# Altium PCB ESC.PcbDoc (part 2 of 2)
Units mm, origin at the board's own origin, x right, y up, seen from the top; angles counter-clockwise.
Board outline 45.01 x 30 mm, 4 copper layers (L1-SIGNAL/PWR, L2-GND, L3-PWR, L4-SIGNAL/PWR), stack 1.723 mm thick; 140 components, 74 nets, 427 pads, 338 vias.
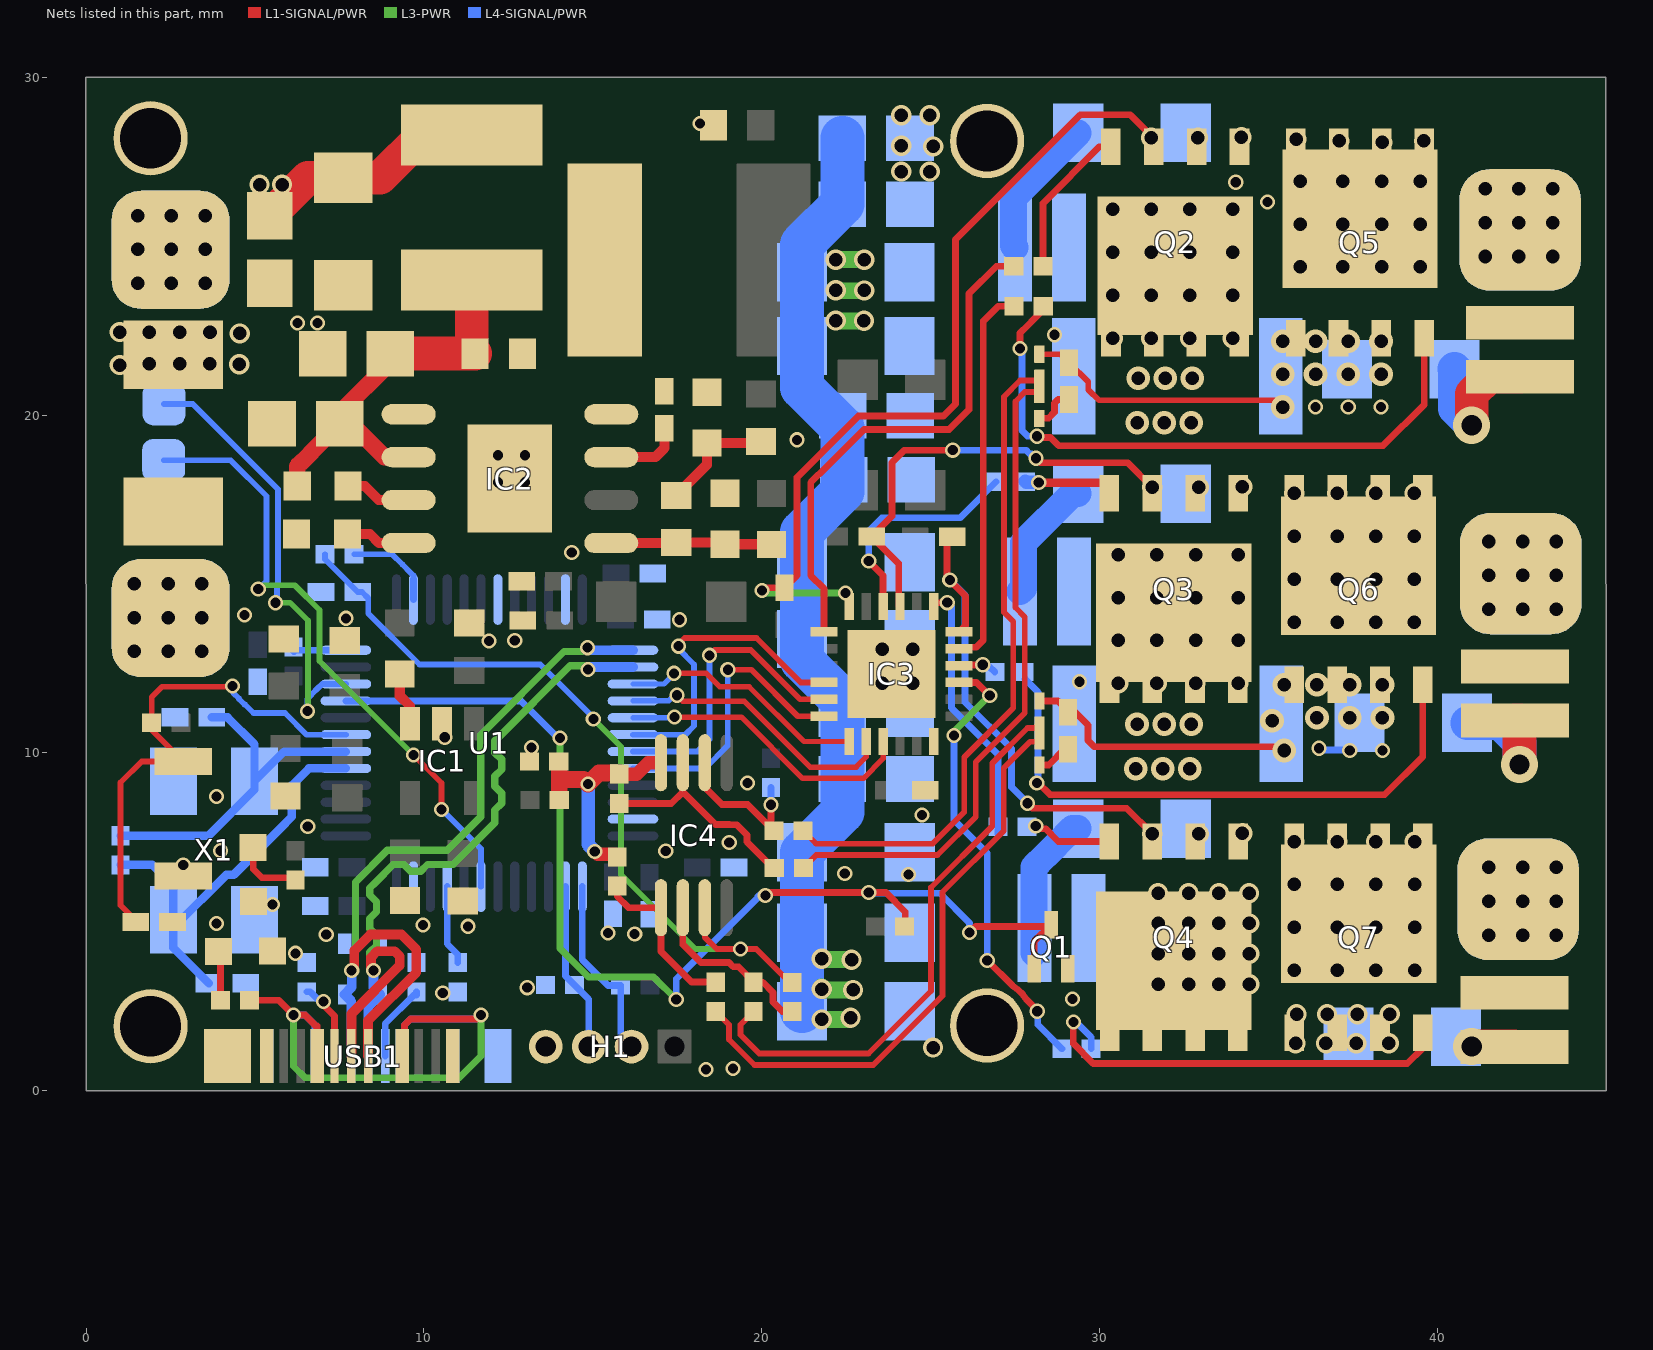
[diagram p4: the nets of this part, all layers, seen from the top]

## Via types
v1: diameter 0.6, hole 0.4, L1-SIGNAL/PWR to L4-SIGNAL/PWR, 160 vias
v2: diameter 0.45, hole 0.3, L1-SIGNAL/PWR to L4-SIGNAL/PWR, tented both sides, 105 vias
v3: diameter 0.6, hole 0.4, L1-SIGNAL/PWR to L4-SIGNAL/PWR, tented both sides, 35 vias
v4: diameter 0.7, hole 0.4, L1-SIGNAL/PWR to L4-SIGNAL/PWR, tented both sides, 24 vias
v5: diameter 0.7, hole 0.4, L1-SIGNAL/PWR to L4-SIGNAL/PWR, 6 vias
v6: diameter 0.45, hole 0.3, L1-SIGNAL/PWR to L4-SIGNAL/PWR, 5 vias
v7: diameter 1.1, hole 0.6, L1-SIGNAL/PWR to L4-SIGNAL/PWR, tented both sides, 2 vias
v8: diameter 1.1, hole 0.6, L1-SIGNAL/PWR to L4-SIGNAL/PWR, 1 vias

## Nets (pads, with @x,y where several pads share a name; then routed paths per layer and width w, separated by ;. In a path a pad name is that pad's centre, name@x,y a point inside that pad or via, vN(x,y) a via of type N, cw(c..) or ccw(c..) an arc to the next point about the centre after c; other vN are vias at no path point) (continued)
CSB: C43.2 IC4.7 R9.1 R23.1 | length 23.7
  L1-SIGNAL/PWR w0.17: IC4.7@18.315,5.414 18.315,4.541 18.666,4.19 19.838,4.19 20.827,3.201 R9.1@20.904,3.201
  L3-PWR w0.17: v2(15.014,10.996) 15.834,10.177 15.834,6.398 18.042,4.19 v2(19.369,4.19)
  L4-SIGNAL/PWR w0.17: R23.1@7.066,15.875 7.066,15.733 C43.2@8.042,14.758 8.167,14.758 8.352,14.573 8.352,14.128 9.866,12.614 13.441,12.614 15.014,11.041 v2(15.014,10.996)
GHA: IC3.19 R27.1 | length 15.3
  L1-SIGNAL/PWR w0.2: IC3.19@21.845,13.583 21.845,14.858 21.45,15.253 21.45,17.998 21.948,18.496 23.027,19.575 25.552,19.575 26.136,20.16 26.136,23.596 26.944,24.404 R27.1@27.462,24.404
GHB: IC3.16 R28.1 | length 6.8
  L1-SIGNAL/PWR w0.2: v2(23.168,15.675) 23.595,15.248 IC3.16@23.595,14.333
  L4-SIGNAL/PWR w0.2: v2(23.168,15.675) 23.168,16.56 23.564,16.956 25.872,16.956 R28.1@26.944,18.027
GHC: IC3.13 R29.1 | length 7.9
  L1-SIGNAL/PWR w0.2: IC3.13@25.095,14.333 25.095,14.405 25.135,14.445 v2(25.493,14.445)
  L4-SIGNAL/PWR w0.2: v2(25.493,14.445) 25.618,14.32 25.618,13.152 25.618,11.332 26.995,9.955 R29.1@26.995,7.606
GLA: IC3.11 R33.1 | length 11.4
  L1-SIGNAL/PWR w0.2: IC3.11@25.845,13.083 25.885,13.123 26.349,13.123 26.563,13.337 26.563,22.781 27.006,23.225 R33.1@27.47,23.225
GLB: IC3.10 R34.1 | length 1.2
  L1-SIGNAL/PWR w0.2: IC3.10@25.845,12.583 25.857,12.596 26.53,12.596 v2(26.543,12.608)
  L4-SIGNAL/PWR w0.2: v2(26.543,12.608) 26.574,12.608 26.622,12.56 26.733,12.56 R34.1@26.903,12.39
GLC: IC3.9 R35.1 | length 13.4
  L1-SIGNAL/PWR w0.2: IC3.9@25.845,12.083 26.363,12.083 v2(26.751,11.695) ; v2(26.679,3.853) 27.428,3.103 cw(c26.673,1.924) 27.852,2.679 28.073,2.458 28.073,2.431 v2(28.157,2.347)
  L3-PWR w0.2: v2(25.692,10.515) 25.663,10.515 25.617,10.561 v2(26.751,11.695)
  L4-SIGNAL/PWR w0.2: v2(25.692,10.515) 25.692,8.005 26.681,7.016 26.679,7.014 v2(26.679,3.853) ; v2@28.177,2.344 28.177,1.947 R35.1@28.89,1.234
GND: -.1 C1.1 C2.1 C4.1 C5.1 C6.1 C7.1 C8.1 C9.1 C10.1 C11.1 C12.1 C13.1 C14.1 C15.1 C16.1 C17.1 C18.1 C19.1 C20.1 C21.1 C22.1 C23.1 C24.1 C25.1 C26.1 C27.1 C28.1 C29.1 C30.1 C31.1 C32.1 C33.1 C34.1 C35.2 C36.1 C37.1 C40.1 C41.2 C42.1 C43.1 C52.1 C53.1 C54.1 D1.1 D2.1 D4.1 H1.4 IC1.2 IC2.1 IC2.9 IC3.6 IC3.25 J3.2 J4.2 LED1.1 LED2.1 pad.11 Q1.2 Q7.1 Q7.2 Q7.3 R4.1 R5.2 R13.1 R18.1 R19.2 R20.2 R38.1 R39.1 R45.1 SW1.2 TP5.1 U1.19 U1.23 U1.35 U1.47 USB1.0 USB1.A1 USB1.A12 USB1.B1 USB1.B12 X1.2 X1.4 | length 2.3
  L1-SIGNAL/PWR w0.2: J3.2@28.22,19.9 28.225,19.905 28.493,19.905 28.673,20.085 28.673,20.353 28.778,20.458 C53.1@29.101,20.458 ; C54.1@29.068,10.108 28.967,10.108 28.499,9.639 J4.2@28.232,9.639 ; J4.2@28.232,9.639 J4.2@28.227,9.635 J4.2@28.232,9.639
  other v1: 35.806,1.4 36.706,1.4 35.838,2.262 36.738,2.262 24.472,12.055 1.426,13 2.426,13 3.426,13 24.472,13.066 1.426,14 2.426,14 3.426,14 1.426,15 2.426,15 3.426,15 25.078,27.952 24.13,27.975
  other v2: 18.352,0.624 19.154,0.651 29.198,2.707 10.557,2.891 13.057,3.045 6.198,4.062 7.107,4.617 16.239,4.636 15.451,4.661 11.306,4.861 9.975,4.901 3.858,4.943 5.516,5.508 24.344,6.394 22.46,6.429 2.871,6.679 3.976,7.099 17.159,7.088 19.039,7.345 6.557,7.82 24.744,8.162 3.858,8.702 19.579,9.101 13.183,10.156 10.616,10.461 29.412,12.104 11.921,13.314 12.686,13.321 17.562,13.94 7.688,13.981 4.689,14.082 14.376,15.93 21.042,19.266 28.666,22.377 6.257,22.725 6.85,22.725 34.979,26.311 34.037,26.893 18.17,28.63
  other v3: 25.072,1.273 37.606,1.4 38.567,1.403 37.638,2.262 38.599,2.265 23.572,12.055 23.572,13.066 24.13,27.21 24.973,27.21 24.13,28.875 24.973,28.875
  other v4: 31.077,9.525 31.877,9.525 32.677,9.525 31.114,10.842 31.914,10.842 32.714,10.842 31.118,19.774 31.916,19.769 32.716,19.769 31.153,21.085 31.953,21.085 32.753,21.085
  other v6: 12.195,18.012 12.995,18.012 12.195,18.812 12.995,18.812
INHA: IC3.22 U1.30 | length 9.5
  L1-SIGNAL/PWR w0.17: v2(17.534,13.157) 17.563,13.157 17.563,13.241 17.717,13.395 19.843,13.395 21.156,12.083 IC3.22@21.845,12.083
  L4-SIGNAL/PWR w0.17: U1.30@16.188,10.537 17.044,10.537 17.737,10.537 17.998,10.797 17.998,12.617 17.534,13.081 v2(17.534,13.157)
INHB: IC3.23 U1.31 | length 9
  L1-SIGNAL/PWR w0.17: v2(18.451,12.885) 18.608,13.043 19.675,13.043 21.134,11.583 IC3.23@21.845,11.583
  L4-SIGNAL/PWR w0.17: U1.31@16.188,10.037 18.089,10.037 18.451,10.399 v2(18.451,12.885)
INHC: IC3.24 U1.32 | length 8.8
  L1-SIGNAL/PWR w0.17: v2(18.997,12.459) 19,12.457 19.694,12.457 21.068,11.083 IC3.24@21.845,11.083
  L4-SIGNAL/PWR w0.17: U1.32@16.188,9.537 18.322,9.537 18.997,10.213 v2(18.997,12.459)
INLA: IC3.1 U1.27 | length 7.4
  L1-SIGNAL/PWR w0.16: v2(17.4,12.352) 18.361,12.352 18.759,11.954 19.631,11.954 21.252,10.333 IC3.1@22.595,10.333
  L4-SIGNAL/PWR w0.16: U1.27@16.188,12.037 17.108,12.037 17.4,12.33 v2(17.4,12.352)
INLB: IC3.2 U1.28 | length 8.4
  L1-SIGNAL/PWR w0.16: v2(17.488,11.703) 17.663,11.528 18.611,11.528 19.48,11.528 21.435,9.573 22.794,9.573 23.095,9.874 IC3.2@23.095,10.333
  L4-SIGNAL/PWR w0.16: U1.28@16.188,11.537 17.243,11.537 17.409,11.703 v2(17.488,11.703)
INLC: IC3.3 U1.29 | length 8.9
  L1-SIGNAL/PWR w0.16: v2(17.415,11.057) 17.417,11.055 17.64,11.055 19.402,11.055 21.214,9.243 23.007,9.243 23.595,9.831 IC3.3@23.595,10.333
  L4-SIGNAL/PWR w0.16: U1.29@16.188,11.037 17.395,11.037 v2(17.415,11.057)
JTCK/SWCLK: H1.3 R45.2 U1.38 | length 5
  L4-SIGNAL/PWR w0.2: U1.38@14.188,6.037 14.188,3.393 R45.2@14.46,3.121 14.876,2.704 H1.3@14.876,1.301
JTMS/SWDIO: H1.2 R44.1 U1.37 | length 5.6
  L4-SIGNAL/PWR w0.2: U1.37@14.688,6.037 14.688,3.87 15.043,3.515 15.447,3.111 R44.1@15.823,3.111 15.823,1.624 H1.2@16.146,1.301
NetC3_1: C3.1 IC2.8 L1.1 RA.2
NetC3_2: C3.2 IC2.7 | length 2.3
  L1-SIGNAL/PWR w0.3: IC2.7@15.546,18.753 16.848,18.753 17.117,19.022 C3.2@17.117,19.611
NetC47_2: C47.2 R24.1 | length 4.2
  L4-SIGNAL/PWR w0.8: R24.1@27.501,24.966 27.451,25.016 27.451,26.434 C47.2@29.372,28.355
NetC48_2: C48.2 R25.1 | length 3.7
  L4-SIGNAL/PWR w0.8: R25.1@27.645,14.771 27.745,14.871 27.745,16.219 29.199,17.673 C48.2@29.372,17.673
NetC49_2: C49.2 R26.1 | length 4.2
  L4-SIGNAL/PWR w0.8: R26.1@28.069,4.066 28.069,6.624 28.387,6.942 ; 28.459,7.01 28.743,7.294 28.743,7.298 29.198,7.753 C49.2@29.372,7.753
NetC50_1: C50.1 C53.2 J1.2 Q5.1 Q5.2 Q5.3 R38.2 | length 8
  L1-SIGNAL/PWR w0.17: J1.2@28.221,21.802 28.226,21.797 28.853,21.797 C53.2@29.101,21.548 29.666,20.984 ; 29.666,20.983 29.671,20.977 29.671,20.748 29.984,20.435 30.884,20.435 32.969,20.435 35.23,20.435 v4(35.427,20.238)
  other v2: 36.397,20.238 37.367,20.238 38.337,20.238
  other v4: 35.427,21.208 36.397,21.208 37.367,21.208 38.337,21.208 36.397,22.182
  other v5: 35.427,22.182 37.367,22.182 38.337,22.182
NetC50_2: C50.2 R30.1 | length 4.4
  L1-SIGNAL/PWR w1: v7(41.021,19.699) 41.021,20.623 41.529,21.131 R30.1@42.447,21.131
  L4-SIGNAL/PWR w1: C50.2@40.513,21.36 40.524,21.35 40.524,20.196 v7(41.021,19.699)
NetC51_1: C51.1 C54.2 J2.2 Q6.1 Q6.2 Q6.3 R39.2 | length 9.1
  L1-SIGNAL/PWR w0.2: J2.2@28.227,11.533 28.768,11.533 29.068,11.232 29.248,11.232 29.664,10.817 29.664,10.364 29.853,10.175 35.364,10.175 v5(35.471,10.068)
  L4-SIGNAL/PWR w0.2: v2(36.499,10.134) 36.547,10.086 C51.1@37.403,10.086 ; C51.1@37.37,10.053 C51.1@37.395,10.029
  other v2: 37.411,10.068 38.381,10.068
  other v4: 36.441,11.038 37.411,11.038 38.381,11.038 36.441,12.012 37.411,12.012 38.381,12.012
  other v5: 35.11,10.947 35.471,12.012
NetC51_2: C51.2 R31.1 | length 3.9
  L1-SIGNAL/PWR w1: R31.1@42.298,10.954 42.441,10.954 v7(42.441,9.652)
  L4-SIGNAL/PWR w1: C51.2@40.888,10.885 41.859,10.885 42.441,10.303 v7(42.441,9.652)
NetC52_2: C52.2 R32.1 | length 1.3
  L1-SIGNAL/PWR w1: v8(41.021,1.301) R32.1@42.281,1.301
NetCA_1: CA.1 CB.2 RA.1 | length 3.5
  L1-SIGNAL/PWR w0.3: CB.2@17.473,17.625 18.376,18.528 RA.1@18.376,19.17 19.931,19.17 CA.1@19.98,19.22
NetCB_1: CB.1 IC2.5 R1.1 R5.1 | length 4.8
  L1-SIGNAL/PWR w0.3: IC2.5@15.546,16.213 17.461,16.213 CB.1@17.473,16.225 18.864,16.225 R5.1@18.914,16.175 20.279,16.175 R1.1@20.286,16.169
NetIC1_3: IC1.3 R2.2 | length 1.6
  L1-SIGNAL/PWR w0.3: R2.2@9.284,12.334 9.284,11.684 9.584,11.384 IC1.3@9.584,10.862
NetIC2_3: IC2.3 R3.2 | length 2
  L1-SIGNAL/PWR w0.3: R3.2@7.754,17.9 8.245,17.9 8.662,17.483 IC2.3@9.546,17.483
NetIC2_4: IC2.4 R4.2 | length 1.9
  L1-SIGNAL/PWR w0.3: R4.2@7.733,16.478 8.4,16.478 8.665,16.213 IC2.4@9.546,16.213
NetIC4_2: IC4.2 R8.1 R10.2 | length 4.7
  L1-SIGNAL/PWR w0.2: IC4.2@18.315,9.706 18.315,8.971 18.819,8.467 19.584,8.467 R10.2@20.276,7.776 ; v2(20.276,8.461) R10.2@20.276,7.776 ; R10.2@20.483,7.568 R10.2@20.359,7.692 R10.2@20.276,7.776
  L4-SIGNAL/PWR w0.2: v2(20.276,8.461) R8.1@20.276,8.972
NetIC4_3: IC4.3 R14.1 R16.2 | length 6.6
  L1-SIGNAL/PWR w0.2: R14.1@15.784,8.501 17.322,8.501 17.665,8.845 ; IC4.3@17.665,9.706 17.665,8.845 ; R16.2@20.37,6.589 20.339,6.589 19.564,7.364 19.564,7.563 19.257,7.87 19.058,7.87 19.05,7.878 18.632,7.878 17.665,8.845
NetIC4_5: IC4.5 R15.2 R17.1 | length 5
  L1-SIGNAL/PWR w0.2: R15.2@15.724,6.05 15.724,5.749 16.058,5.414 IC4.5@17.015,5.414 17.015,4.118 17.918,3.215 18.626,3.215 R17.1@18.637,3.205
NetIC4_6: IC4.6 R9.2 R11.1 | length 5.3
  L1-SIGNAL/PWR w0.2: IC4.6@17.665,5.414 17.665,4.327 18.204,3.788 19.031,3.788 19.154,3.665 19.313,3.665 19.76,3.218 R11.1@19.76,3.205 20.034,3.205 20.334,2.906 20.334,2.618 20.617,2.336 R9.2@20.904,2.336
NetLED1_2: LED1.2 R42.2 | length 2
  L1-SIGNAL/PWR w0.2: LED1.2@4.944,7.202 4.944,6.554 5.195,6.303 6.129,6.303 R42.2@6.198,6.234
NetLED2_2: LED2.2 R43.2 | length 1.5
  L1-SIGNAL/PWR w0.2: LED2.2@3.917,4.118 3.973,4.062 R43.2@3.973,2.674
NetQ2_4: Q2.4 R27.2 | length 4.6
  L1-SIGNAL/PWR w0.2: R27.2@28.327,24.404 28.327,26.27 30.004,27.947 Q2.4@30.338,27.947
NetQ3_4: Q3.4 R28.2 | length 2.7
  L1-SIGNAL/PWR w0.25: v2(28.204,18.001) 28.486,18.001 30.129,18.001 30.294,17.836 Q3.4@30.294,17.682
  L4-SIGNAL/PWR w0.4: R28.2@27.807,18.033 27.829,18.011 28.195,18.011 v2(28.204,18.001)
NetQ4_4: Q4.4 R29.2 | length 2.4
  L1-SIGNAL/PWR w0.2: v2(28.113,7.83) 28.127,7.83 28.204,7.753 28.401,7.753 28.781,7.373 Q4.4@30.296,7.373
NetQ5_4: Q5.4 R33.2 | length 18.6
  L1-SIGNAL/PWR w0.2: v6(27.65,21.971) 27.65,22.428 27.877,22.655 28.053,22.83 28.336,23.113 R33.2@28.336,23.225 ; v2(28.153,19.374) 28.191,19.335 28.552,19.335 28.793,19.094 30.932,19.094 38.398,19.094 39.62,20.316 Q5.4@39.62,22.277
  L4-SIGNAL/PWR w0.2: v6(27.65,21.971) 27.66,21.961 27.705,21.961 27.705,19.541 27.872,19.374 v2(28.153,19.374)
NetQ6_4: Q6.4 R34.2 | length 17.4
  L1-SIGNAL/PWR w0.2: v2(28.146,9.108) 28.165,9.127 28.532,8.76 38.447,8.76 39.576,9.888 Q6.4@39.576,12.012
  L4-SIGNAL/PWR w0.2: R34.2@27.797,12.181 28.184,11.794 28.184,9.147 v2(28.146,9.108)
NetQ7_4: Q7.4 R35.2 | length 12.9
  L1-SIGNAL/PWR w0.2: v2(29.228,2.025) 29.228,1.386 29.814,0.8 39.113,0.8 39.578,1.265 Q7.4@39.578,1.704
  L4-SIGNAL/PWR w0.2: v2@29.272,2.064 29.755,1.58 R35.2@29.755,1.234
NetR18_2: R18.2 USB1.A5 | length 2.4
  L1-SIGNAL/PWR w0.2: v2(7.022,2.638) 7.023,2.535 7.029,2.529 7.35,2.208 USB1.A5@7.35,1.016
  L4-SIGNAL/PWR w0.2: R18.2@6.53,2.922 6.636,2.922 6.971,2.587 v2(7.022,2.638)
NetR19_1: R19.1 U1.45 | length 2.4
  L4-SIGNAL/PWR w0.2: U1.45@10.688,6.037 10.688,4.344 10.998,4.034 R19.1@10.998,3.788
NetR20_1: R20.1 USB1.B5 | length 2.3
  L4-SIGNAL/PWR w0.2: USB1.B5@8.85,1.016 8.85,1.978 9.702,2.83 9.778,2.83 R20.1@9.778,2.922
NetR22_2: R22.2 U1.12 | length 1.6
  L4-SIGNAL/PWR w0.2: R22.2@6.14,13.135 6.237,13.037 U1.12@7.688,13.037 ; R22.2@6.149,12.994 R22.2@6.192,13.037
NetR23_2: R23.2 U1.14 | length 3.3
  L4-SIGNAL/PWR w0.17: R23.2@7.932,15.875 9.059,15.875 9.362,15.572 9.608,15.326 9.688,15.246 U1.14@9.688,14.537
  L4-SIGNAL/PWR w0.2: U1.14@9.688,14.537 U1.14@9.688,15.146
OSC_IN: C40.2 R12.2 U1.5 X1.3 | length 12.6
  L4-SIGNAL/PWR w0.25: R12.2@1.016,6.679 1.957,6.679 2.583,6.053 2.583,5.339 X1.3@2.583,5.062 ; C40.2@3.635,3.173 2.583,4.225 X1.3@2.583,5.062 ; U1.5@7.688,9.537 6.591,9.537 6.088,9.034 6.088,8.108 6.008,8.027 5.817,7.837 4.367,6.387 4.148,6.387 3.958,6.197 2.823,5.062 X1.3@2.583,5.062
OSC_OUT: C41.1 R12.1 U1.6 X1.1 | length 10.5
  L4-SIGNAL/PWR w0.25: R12.1@1.016,7.545 3.62,7.545 4.983,8.907 X1.1@4.983,9.162 ; C41.1@3.72,11.049 4.187,11.049 4.983,10.253 X1.1@4.983,9.162 ; U1.6@7.688,10.037 5.858,10.037 X1.1@4.983,9.162
PWM/DSHOT: TP4.1 U1.43 | length 18.7
  L1-SIGNAL/PWR w0.17: v2(9.687,9.937) 10.52,9.104 v2(10.52,8.317)
  L3-PWR w0.17: v2(5.094,14.847) 5.209,14.962 6.173,14.962 6.908,14.227 6.908,12.715 v2(9.687,9.937)
  L4-SIGNAL/PWR w0.17: TP4.1@2.293,18.658 4.277,18.658 5.335,17.6 5.335,15.088 v2(5.094,14.847) ; v2@10.534,8.311 11.688,7.156 U1.43@11.688,6.037
RST: C35.1 R6.1 SW1.1 U1.7 | length 15.7
  L1-SIGNAL/PWR w0.17: C35.1@1.463,4.988 C35.1@1.625,4.826 ; C35.1@1.511,4.988 1.016,5.483 1.016,9.118 1.643,9.745 2.236,9.745 SW1.1@2.871,9.745 1.834,10.782 R6.1@1.938,10.886 1.938,11.652 2.241,11.954 4.314,11.954 v2(4.334,11.974)
  L4-SIGNAL/PWR w0.17: v2(4.334,11.974) 4.382,11.926 4.355,11.898 4.355,11.773 4.522,11.606 4.522,11.594 4.689,11.427 4.701,11.427 4.951,11.177 5.882,11.177 6.522,10.537 U1.7@7.688,10.537
SA_N: J1.1 R10.1 | length 19.6
  L1-SIGNAL/PWR w0.17: R10.1@21.225,7.692 21.607,7.31 25.063,7.31 25.995,8.243 25.995,9.868 27.449,11.322 27.449,13.883 27.171,14.161 27.171,20.544 27.648,21.021 28.151,21.021 J1.1@28.221,21.09
SA_P: J3.1 R16.1 | length 19.6
  L1-SIGNAL/PWR w0.17: R16.1@21.236,6.589 21.617,6.97 25.203,6.97 26.335,8.102 26.335,9.727 27.789,11.182 27.789,14.024 27.511,14.302 27.511,20.403 27.789,20.681 28.151,20.681 J3.1@28.22,20.611
SB_N: J2.1 R11.2 | length 16.9
  L1-SIGNAL/PWR w0.17: R11.2@19.76,2.34 19.369,1.948 19.369,1.651 19.925,1.095 23.161,1.095 25.013,2.946 25.013,6.015 26.824,7.826 26.824,9.687 27.869,10.732 28.087,10.732 28.176,10.821 J2.1@28.227,10.821
SB_P: J4.1 R17.2 | length 17.4
  L1-SIGNAL/PWR w0.17: R17.2@18.637,2.34 19.029,1.948 19.029,1.51 19.784,0.755 23.302,0.755 25.353,2.806 25.353,5.874 27.164,7.685 27.164,9.546 27.944,10.326 28.207,10.326 J4.1@28.227,10.346
SHA: C44.1 C47.1 IC3.18 Q2.1 Q2.2 Q2.3 Q5.5 Q5.6 Q5.7 Q5.8 Q5.9 R30.2 TP6.1 TP8.1 | length 25.5
  L1-SIGNAL/PWR w0.2: v2(20.006,14.805) 20.086,14.885 C44.1@20.674,14.885 21.042,15.253 21.042,18.155 22.861,19.975 25.386,19.975 25.736,20.325 25.736,25.197 28.073,27.534 29.429,28.889 30.915,28.889 31.538,28.266 31.538,28.017 Q2.3@31.608,27.947 ; v2(22.479,14.732) 22.595,14.616 IC3.18@22.595,14.333
  L3-PWR w0.2: v2(20.006,14.805) 20.079,14.732 v2(22.479,14.732)
  other v1: 35.941,24.384 37.211,24.384 38.354,24.384 39.497,24.384 41.421,24.695 42.421,24.695 43.421,24.695 35.941,25.654 37.211,25.654 38.354,25.654 39.497,25.654 41.421,25.695 42.421,25.695 43.421,25.695 41.421,26.695 42.421,26.695 43.421,26.695 38.375,28.072 37.103,28.116 39.608,28.116 35.83,28.164 31.538,28.208 32.918,28.208 34.205,28.227
  other v3: 35.941,26.924 37.211,26.924 38.354,26.924 39.497,26.924
SHB: C45.1 C48.1 IC3.15 Q3.1 Q3.2 Q3.3 Q6.5 Q6.6 Q6.7 Q6.8 Q6.9 R31.2 TP7.1 TP9.1 | length 13.5
  L1-SIGNAL/PWR w0.2: IC3.15@24.095,14.333 24.055,14.373 24.055,15.602 C45.1@23.254,16.403 23.857,17.005 23.857,18.591 24.226,18.96 v2(25.658,18.96) ; v2(28.12,18.722) 28.251,18.591 30.833,18.591 v1(31.564,17.861) ; Q3.3@31.564,17.682 v1(31.564,17.861) ; Q3.3@31.564,18.04 v1(31.564,17.861)
  L4-SIGNAL/PWR w0.2: v2(25.658,18.96) 27.824,18.96 27.936,18.849 27.994,18.849 v2(28.12,18.722)
  other v1: 35.771,13.871 37.041,13.871 38.184,13.871 39.327,13.871 41.53,14.256 42.53,14.256 43.53,14.256 35.771,15.141 37.041,15.141 38.184,15.141 39.327,15.141 41.53,15.256 42.53,15.256 43.53,15.256 41.53,16.256 42.53,16.256 43.53,16.256 35.771,16.411 37.041,16.411 38.184,16.411 39.327,16.411 35.771,17.681 37.041,17.681 38.184,17.681 39.327,17.681 32.944,17.861 34.232,17.879
SHC: C46.1 C49.1 IC3.12 Q4.1 Q4.2 Q4.3 Q7.5 Q7.6 Q7.7 Q7.8 Q7.9 R32.2 W.1 | length 14.8
  L1-SIGNAL/PWR w0.2: C46.1@25.64,16.4 25.485,16.244 25.485,15.18 25.694,14.97 25.71,14.97 26.018,14.662 26.018,14.646 26.035,14.629 26.035,13.773 IC3.12@25.845,13.583 ; v2(27.869,8.507) 28.021,8.355 28.33,8.355 30.809,8.355 v1(31.566,7.598)
  L4-SIGNAL/PWR w0.2: v2@25.561,15.127 26.018,14.671 26.018,11.497 27.395,10.121 27.395,8.982 v2(27.869,8.507)
  other v1: 35.773,3.563 37.043,3.563 38.186,3.563 39.329,3.563 41.529,4.604 42.529,4.604 43.529,4.604 35.773,4.833 37.043,4.833 38.186,4.833 39.329,4.833 41.529,5.604 42.529,5.604 43.529,5.604 35.773,6.103 37.043,6.103 38.186,6.103 39.329,6.103 41.529,6.604 42.529,6.604 43.529,6.604 35.773,7.373 37.043,7.373 38.186,7.373 39.329,7.373 32.946,7.598 34.234,7.617
  other v2: 25.57,15.114
TEMP: Q1.1 Q1.3 R21.1 U1.9 | length 34
  L1-SIGNAL/PWR w0.2: v2(20.107,5.777) 20.107,5.745 v2@20.194,5.745 ; v2@20.195,5.745 20.195,5.864 v2(23.17,5.864) 23.677,5.864 24.25,5.291 R21.1@24.25,4.81 ; v2@26.155,4.677 26.332,4.854 Q1.3@28.561,4.854 ; Q1.1@28.068,3.608 28.068,4.408 Q1.3@28.568,4.908
  L3-PWR w0.2: v2(14.028,10.439) 14.028,4.203 14.871,3.361 16.798,3.361 v2(17.468,2.691)
  L4-SIGNAL/PWR w0.2: U1.9@7.688,11.537 12.869,11.537 13.998,10.408 v2(14.028,10.439) ; v2(17.468,2.691) 17.468,3.302 17.857,3.691 19.885,5.718 19.885,5.745 19.916,5.777 v2(20.107,5.777) ; v2@23.241,5.842 25.273,5.842 26.154,4.961 v2(26.154,4.677)
TX: TP3.1 U1.10 | length 13.4
  L3-PWR w0.17: v2(5.603,14.442) 5.603,14.446 6.035,14.446 6.565,13.915 6.565,11.323 6.565,11.249 v2(6.548,11.232)
  L4-SIGNAL/PWR w0.17: TP3.1@2.304,20.327 3.153,20.327 5.675,17.804 5.675,14.947 5.65,14.922 5.65,14.49 v2(5.603,14.442) ; v2(6.548,11.232) 6.548,11.306 6.565,11.323 6.544,11.344 6.544,11.594 6.653,11.703 6.653,11.711 6.899,11.957 6.907,11.957 6.987,12.037 U1.10@7.688,12.037
USB_N: D2.2 U1.25 USB1.A7 USB1.B7 | length 24.7
  L1-SIGNAL/PWR w0.289: v2@7.936,3.556 v2(7.859,3.556) 7.938,3.635 7.938,4.144 8.411,4.617 9.337,4.617 9.772,4.182 9.772,3.495 8.346,2.069 8.346,1.02 USB1.A7@8.35,1.016
  L3-PWR w0.217: v2@7.972,3.556 v2(7.859,3.556) 7.974,3.671 7.974,6.169 8.917,7.112 10.688,7.112 11.678,8.102 11.678,10.527 14.148,12.997 14.725,12.997 v2(14.84,13.112)
  L4-SIGNAL/PWR w0.289: USB1.B7@7.85,1.016 7.85,2.644 D2.2@7.647,2.846 7.859,3.058 v2(7.859,3.556) ; v2(14.84,13.112) 14.859,13.112 14.938,13.033 16.184,13.033 U1.25@16.188,13.037
USB_P: D4.2 U1.26 USB1.A6 USB1.B6 | length 23.5
  L1-SIGNAL/PWR w0.289: USB1.A6@7.85,1.016 7.854,1.02 7.854,2.273 9.28,3.699 9.28,3.978 9.133,4.125 8.615,4.125 8.43,3.94 8.43,3.635 v2(8.509,3.556)
  L3-PWR w0.217: v2@8.619,3.556 v2(8.509,3.556) 8.394,3.671 8.394,4.091 8.594,4.291 8.594,4.591 8.394,4.791 8.394,5.091 8.594,5.291 8.594,5.591 8.394,5.791 8.394,5.995 8.555,6.156 9.091,6.692 9.294,6.692 9.403,6.692 9.603,6.492 9.903,6.492 10.103,6.692 10.862,6.692 ; 11.096,6.925 10.862,6.692 ; v2(14.859,12.462) 14.746,12.575 14.617,12.575 14.616,12.577 14.322,12.577 12.224,10.479 12.098,10.353 12.098,10.005 12.298,9.805 12.298,9.505 12.098,9.305 12.098,9.005 12.298,8.805 12.298,8.505 12.098,8.305 12.098,8.197 12.098,7.928 12.04,7.869 10.862,6.692
  L4-SIGNAL/PWR w0.289: USB1.B6@8.35,1.016 8.35,2.488 D4.2@8.708,2.846 8.509,3.045 v2(8.509,3.556) ; v2(14.859,12.462) 14.938,12.541 16.184,12.541 U1.26@16.188,12.537
VBUS: R43.1 USB1.A4 USB1.A9 USB1.B4 USB1.B9 | length 20.3
  L1-SIGNAL/PWR w0.2: R43.1@4.839,2.674 5.697,2.674 v2(6.139,2.232) 6.483,2.232 6.775,1.94 6.775,1.921 6.84,1.921 USB1.A4@6.84,1.016 ; USB1.A9@9.36,1.016 9.425,1.081 9.425,1.94 9.6,2.116 10.099,2.116 ; 10.101,2.116 11.572,2.116 v2(11.688,2.232)
  L3-PWR w0.2: v2(6.139,2.232) 6.139,0.719 6.477,0.381 11.049,0.381 11.688,1.02 v2(11.688,2.232)
  L4-SIGNAL/PWR w0.2: v2(6.139,2.232) 6.483,2.232 6.775,1.94 6.775,1.596 6.84,1.531 USB1.B9@6.84,1.016 ; USB1.B4@9.36,1.016 9.36,1.612 9.425,1.677 9.425,1.94 9.601,2.116 11.572,2.116 v2(11.688,2.232)
VM: +.1 C4.2 C5.2 C6.2 C7.2 C8.2 C9.2 C10.2 C11.2 C12.2 C13.2 C14.2 C15.2 C16.2 C20.2 C21.2 D1.2 L2.1 Q2.5 Q2.6 Q2.7 Q2.8 Q2.9 Q3.5 Q3.6 Q3.7 Q3.8 Q3.9 Q4.5 Q4.6 Q4.7 Q4.8 Q4.9 R24.2 R25.2 R26.2 | length 40.5
  L1-SIGNAL/PWR w1: C20.2@5.437,25.903 6.561,27.027 C21.2@7.612,27.027 8.705,27.027 9.974,28.296 L2.1@11.414,28.296
  L3-PWR w0.5: v3@21.774,3.064 21.86,2.977 v3(22.705,2.977) ; v3(21.779,2.104) 22.581,2.104 v3(22.63,2.153) ; v3@21.839,3.92 21.885,3.874 v3(22.66,3.874) ; v3@22.173,24.641 22.213,24.601 v3(23.038,24.601) ; v3@22.189,22.785 22.194,22.79 v3(23.027,22.79) ; v3@22.262,23.68 23.024,23.68 v3(23.035,23.691)
  L4-SIGNAL/PWR w1.3: C11.2@21.197,2.347 C12.2@21.197,4.667 C16.2@21.197,7.051 22.389,8.244 C9.2@22.389,9.224 C5.2@22.389,11.147 22.389,11.539 21.197,12.731 C10.2@21.197,13.37 C15.2@21.197,15.639 21.197,16.54 22.389,17.732 22.389,19.625 21.197,20.818 21.197,25.055 C4.2@22.389,26.248 C6.2@22.389,28.199
  other v1: 31.737,3.148 32.637,3.148 33.537,3.148 34.437,3.148 31.737,4.048 32.637,4.048 33.537,4.048 34.437,4.048 31.737,4.948 32.637,4.948 33.537,4.948 34.437,4.948 31.737,5.848 32.637,5.848 33.537,5.848 34.43,5.841 30.56,12.056 31.703,12.056 32.846,12.056 34.116,12.056 30.56,13.326 31.703,13.326 32.846,13.326 34.116,13.326 30.56,14.596 31.703,14.596 32.846,14.596 34.116,14.596 30.56,15.866 31.703,15.866 32.846,15.866 34.116,15.866 1.862,21.52 2.762,21.52 3.662,21.52 30.393,22.277 31.536,22.277 32.679,22.277 33.949,22.277 1.864,22.454 2.764,22.454 3.664,22.454 30.393,23.547 31.536,23.547 32.679,23.547 33.949,23.547 1.524,23.903 2.524,23.903 3.524,23.903 30.393,24.817 31.536,24.817 32.679,24.817 33.949,24.817 1.524,24.903 2.524,24.903 3.524,24.903 1.524,25.903 2.524,25.903 3.524,25.903 30.393,26.087 31.536,26.087 32.679,26.087 33.949,26.087
  other v3: 21.779,3.004 21.779,3.904 0.994,21.479 4.528,21.505 4.545,22.416 0.994,22.457 22.189,22.796 22.189,23.696 22.189,24.596 5.133,26.826 5.798,26.826
VREF: IC4.4 R7.1 R13.2 R14.2 R15.1 | length 7.3
  L1-SIGNAL/PWR w0.3: 16.825,9.706 IC4.4@17.015,9.706
  L1-SIGNAL/PWR w0.4: v2(15.055,7.076) 15.068,7.076 15.145,6.998 15.654,6.998 15.724,6.928 R15.1@15.724,6.915 ; R14.2@15.784,9.367 16.298,9.367 16.637,9.706 16.825,9.706
  L1-SIGNAL/PWR w0.5: R13.2@13.991,9.744 14.004,9.73 14.004,9.204 ; R7.1@14.004,8.6 14.004,9.204 ; R14.2@15.784,9.396 15.179,9.396 v2(14.859,9.077) 14.732,9.204 14.004,9.204
  L4-SIGNAL/PWR w0.4: v2(14.859,9.077) 14.859,7.285 15.055,7.089 v2(15.055,7.076)
VSYS: C2.2 C22.2 C26.2 IC2.2 L2.2 R3.1 | length 12.2
  L1-SIGNAL/PWR w0.5: R3.1@6.247,17.9 6.247,18.484 6.376,18.613 6.392,18.613 6.656,18.876 6.656,18.893 C2.2@7.501,19.738 ; C26.2@9.006,21.821 9.006,21.563 7.501,20.058 C2.2@7.501,19.738 ; IC2.2@9.546,18.753 8.835,18.753 7.85,19.738 C2.2@7.501,19.738
  L1-SIGNAL/PWR w1: C26.2@9.006,21.821 C22.2@11.516,21.821 ; C22.2@11.414,21.834 L2.2@11.414,23.996
pads on no net: IC1.4 IC2.6 IC3.5 IC3.7 IC3.8 IC3.21 U1.2 U1.3 U1.4 U1.8 U1.11 U1.13 U1.15 U1.16 U1.17 U1.18 U1.22 U1.33 U1.34 U1.39 U1.40 U1.41 U1.42 U1.44 U1.46 USB1.A2 USB1.A3 USB1.A8 USB1.A10 USB1.A11 USB1.B2 USB1.B3 USB1.B8 USB1.B10 USB1.B11

## Polygon pours and split planes (outlines as drawn)
VM on L3-PWR "NONET_L-01_P-001" (solid, remove dead copper, pour order 3): -0.009,30 44.991,30 45,29.991 45,0 0,0 -0.009,0.009
GND on L3-PWR "NONET_L-01_P-001" (solid, pour order 0): 19.685,15.367 19.685,0 0,0 0,15.367
GND on L2-GND "NONET_L-01_P-001" (solid, pour order 2): -0.009,30 44.991,30 45,29.991 45,0 0,0 -0.009,0.009
GND on L1-SIGNAL/PWR "NONET_L-01_P-001" (solid, remove dead copper, pour order 1): -0.009,30 44.991,30 45,29.991 45,0 0,0 -0.009,0.009
GND on L4-SIGNAL/PWR "NONET_L-01_P-001" (solid, pour order 4): 45,29.991 45,0 0,0 0,29.991 0,0 0,29.991

## Other copper
L1-SIGNAL/PWR:
  region net NetC3_1: 14.224,27.432 16.461,27.432 16.461,21.921 17.183,21.199 18.811,21.199 18.811,20.237 16.731,20.237 16.203,19.71 14.224,19.71
  pour cut-out: 30.784,16.942 31.074,16.942 31.074,17.109 30.926,17.257 30.807,17.257 30.784,17.235
  pour cut-out: 14.851,19.224 14.851,19.611 14.902,19.663 16.406,19.663 16.406,19.114 14.961,19.114
  pour cut-out: 3.895,9.176 4.138,9.176 4.13,9.184 4.13,9.403 3.9,9.403 3.893,9.41 3.89,9.407 3.89,9.184
  pour cut-out: 29.806,6.637 29.806,6.121 29.841,6.087 34.461,6.087 34.461,6.596 34.418,6.639 29.812,6.639
  pour cut-out: 44.035,2.156 44.035,1.99 44.022,1.977 42.504,1.977 42.504,2.145 42.534,2.156 42.55,2.158 44.033,2.158
  pour cut-out: 40.504,11.655 40.504,11.657 40.504,11.82 44.041,11.82 44.076,11.785 44.076,11.668 44.063,11.655
  region net SHA: 31.242,27.332 31.242,28.575 40.005,28.575 41.148,27.432 43.434,27.432 43.942,26.924 43.942,24.003 43.561,23.622 35.433,23.622 35.407,23.648 35.407,26.521 34.46,27.332
  pour cut-out: 28.81,23.934 28.81,23.703 28.818,23.695 26.987,23.695 26.987,23.638 26.581,23.232 26.523,23.289 26.442,23.289 26.442,23.47 26.907,23.934 28.81,23.934
  pour cut-out: 30.828,27.207 31.034,27.207 31.054,27.227 31.054,28.265 30.984,28.335 30.903,28.335 30.828,28.26
  region net VM: 0,26.565 3.661,26.565 4.191,26.035 4.191,20.828 0,20.828
  region net VM: 0.68,22.736 4.569,22.736 4.953,22.352 4.953,21.37 4.411,20.828 0.68,20.828
  region net 12V: 19.304,29.083 19.304,21.717 21.296,21.717 21.296,29.083
  region net SHC: 40.64,2.351 40.64,4.645 43.942,4.645 43.942,2.351
  region net SHC: 31.242,6.731 31.242,8.001 40.005,8.001 40.513,7.493 43.434,7.493 43.942,6.985 43.942,4.572 43.18,3.81 40.767,3.81 40.05,3.093 35.464,3.093 35.464,5.938 34.671,6.731
  region net NetC51_1: 35.104,12.87 35.104,10.433 38.803,10.433 38.803,12.87
  region net NetC50_1: 35.104,22.86 35.104,20.423 38.803,20.423 38.803,22.86
  region net SHB: 40.513,12.012 40.513,14.306 43.815,14.306 43.815,12.012
  region net SHB: 31.242,17.145 31.242,18.288 39.878,18.288 41.021,17.145 43.434,17.145 43.815,16.764 43.815,13.843 43.434,13.462 35.433,13.462 35.306,13.589 35.306,16.383 34.544,17.145
  region net SHA: 40.64,22.217 40.64,24.511 43.942,24.511 43.942,22.217
L2-GND:
  region net VM: 0,26.565 3.661,26.565 4.191,26.035 4.191,20.828 0,20.828
L3-PWR:
  pour cut-out: 0.531,26.333 4.018,26.333 4.018,23.395 0.531,23.395
L4-SIGNAL/PWR:
  pour cut-out: 26.455,18.496 26.45,18.5 26.45,18.654 27.562,18.654 27.581,18.635 27.581,18.477 26.474,18.477
  pour cut-out: 10.272,8.837 10.494,9.059 13.281,9.059 13.281,7.728 12.447,6.894 12.215,6.894
  region net VM: 0,26.565 3.661,26.565 4.826,25.4 4.826,21.52 0,21.52
  region net NetC50_1: 34.794,20.066 38.735,20.066 38.735,22.987 34.794,22.987
  region net GND: 28.574,21.463 33.147,21.463 33.147,19.431 28.574,19.431
  region net GND: 28.57,11.161 33.143,11.161 33.143,9.129 28.57,9.129
  region net VM: 28.897,6.077 32.187,6.077 32.187,3.309 30.881,3.309 28.897,3.309
  region net VM: 29.024,16.124 31.222,16.124 31.222,13.355 31.008,13.355 29.024,13.355
  region net VM: 28.666,26.339 30.864,26.339 30.864,23.57 30.65,23.57 28.666,23.57
  region net NetC51_1: 34.927,9.652 38.862,9.652 38.862,12.573 34.927,12.573

## Silkscreen, mask and mechanical layers (free items; w line width, h text height)
Top Overlay:
  text "GND" at 13.97,2.555 h0.8 r90
  text "CLK" at 15.257,2.555 h0.8 r90
  text "DIO" at 16.637,2.516 h0.8 r90
  text "3V3" at 17.95,2.479 h0.8 r90
Bottom Overlay:
  drawing of 2236 lines, arcs and shapes, not listed
  text "TX" at 3.808,19.89 h0.8
  text "DSHOT" at 3.902,18.156 h0.8
  text "GND" at 3.8,16.361 h0.8